# Altium PCB ESP32-S3-M.2_2024-03-15.pcbdoc
Units mm, origin at the board's own origin, x right, y up, seen from the top; angles counter-clockwise.
Board outline 83.3 x 61.58 mm, 2 copper layers (Top Layer, Bottom Layer); 10 components, 41 nets, 120 pads, 32 vias.
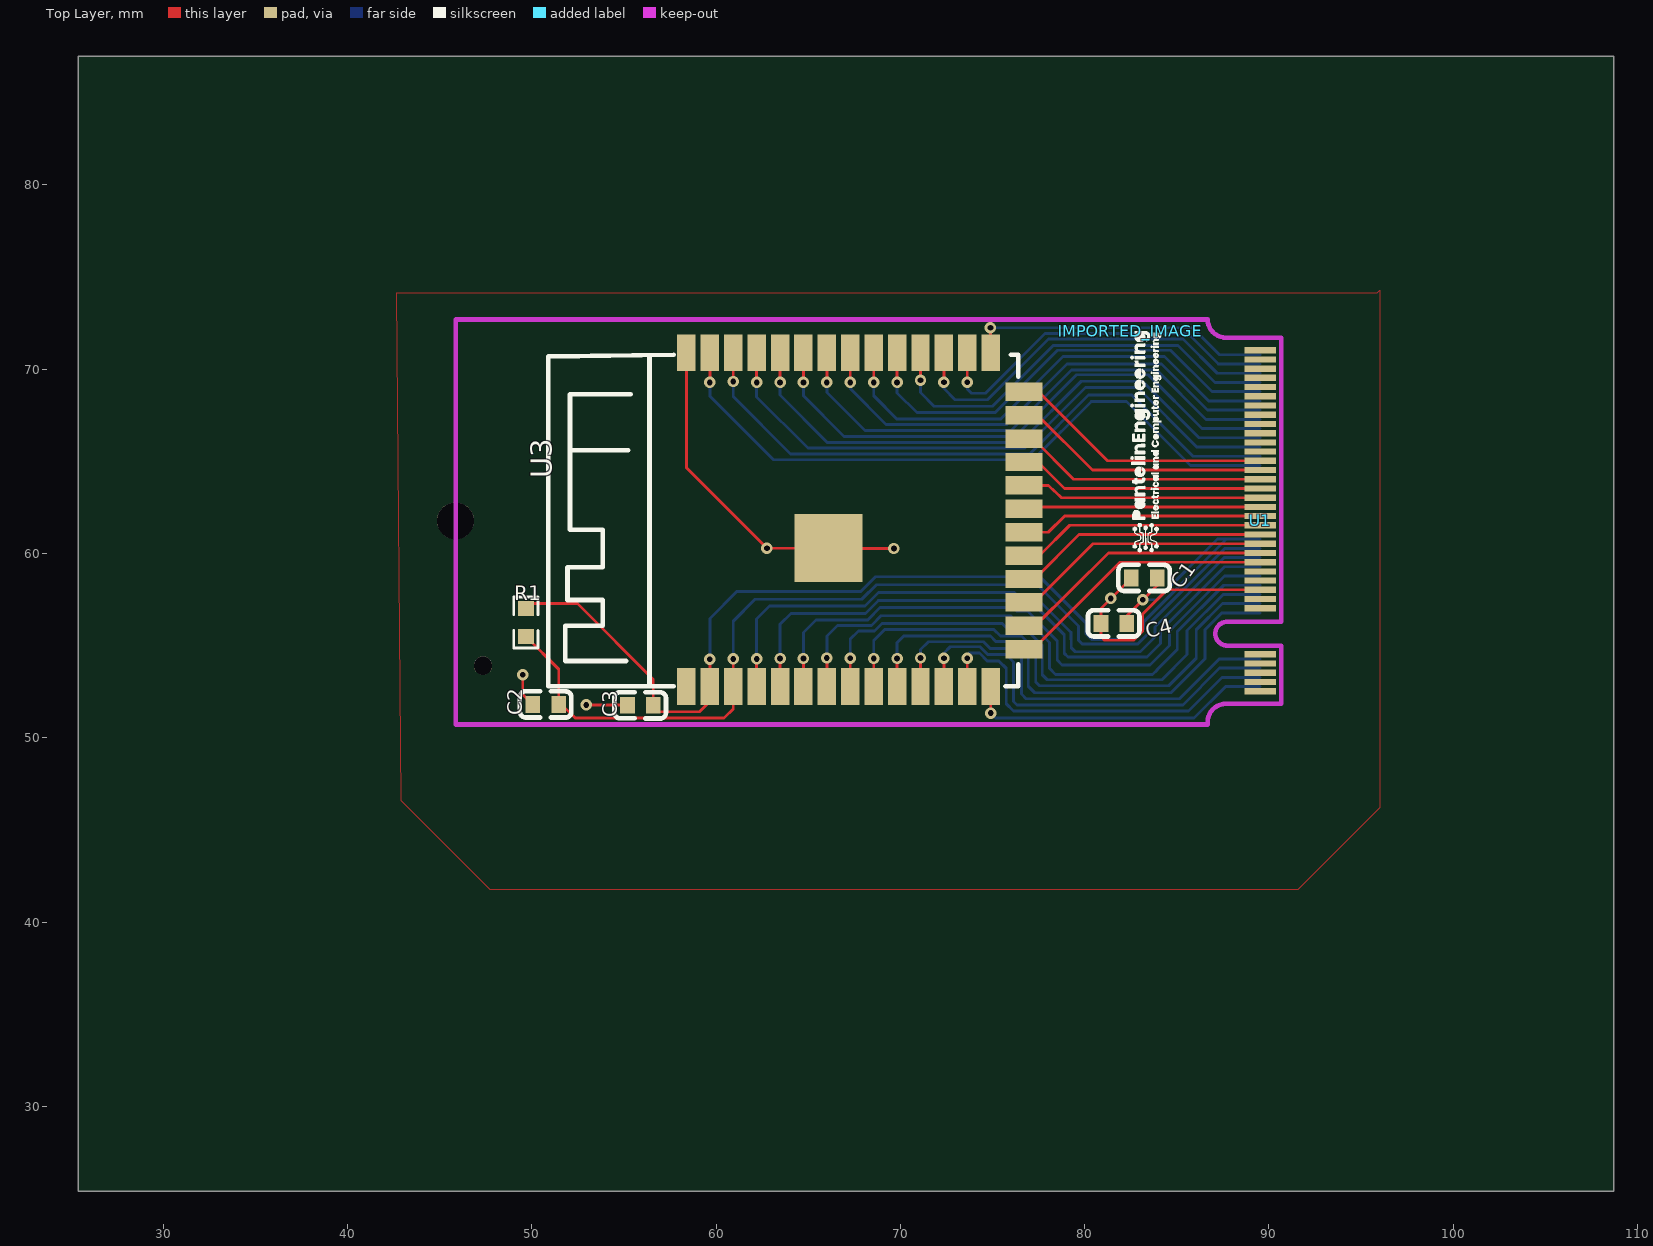
[diagram p0: Top Layer view]
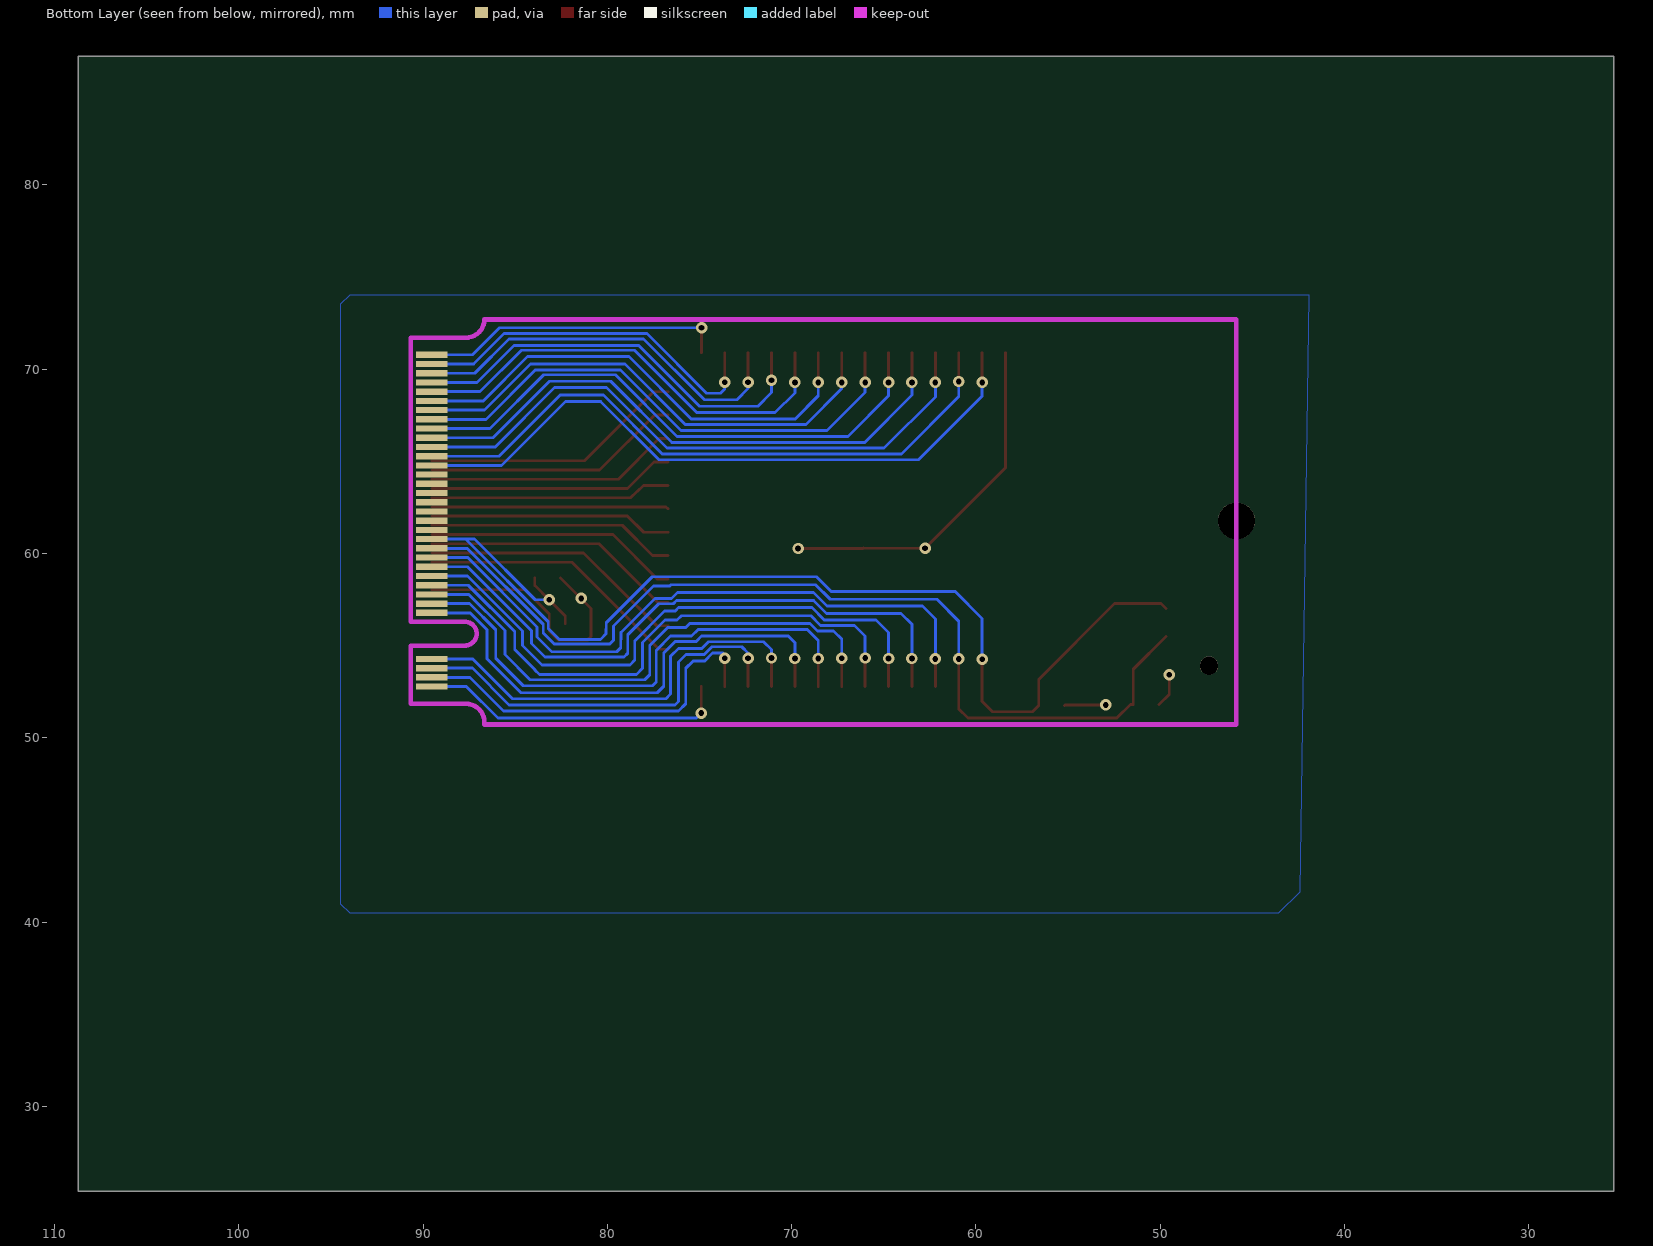
[diagram p1: Bottom Layer view, seen from below]

## Layer stack, top to bottom
Top Layer: signal copper (thickness not stored)
Dielectric: dielectric 0.32, FR-4, Dk 4.8
Bottom Layer: signal copper (thickness not stored)

## Board outline
108.699,25.4 25.4,25.4 25.4,86.975 108.699,86.975

## Components (designator, comment, footprint, x,y, rotation, side; value= is the part's Value field where it differs from the comment)
C1 "22uF" C0603 83.233,58.675 r0 top
C2 "1uF" C0603 50.759,51.811 r0 top
C3 "100nF" C0603 55.891,51.761 r0 top
C4 "2.2uF" C0603 81.583,56.206 r0 top
IMPORTED_IMAGE "IMPORTED_IMAGE" IMPORTED_IMAGE 82.483,72.064 r0 top
R1 "10kΩ" R0603 49.68,56.257 r270 top
U1 "M.2 M key fingers" "M.2 M KEY FINGERS" 90.669,61.782 r0 top
U3 "ESP32-S3-WROOM-1" ESP32-S3-WROOM-1 67.702,61.794 r90 top
? "" ? 68.316,44.994 r0 top
? "" ? 41.998,61.717 r0 top

## Footprints (in the part's own frame and the unit in brackets; to place one, negate y for a bottom-side part, rotate by r counter-clockwise, add the part's x,y. Pads: shape width x height; smd on the part's side, far side on the other; paste and mask are expansions set on the pad)
C0603 [mm]
  rect 0.8x0.9 smd paste+0 mask+0.051: 1(-0.7,0) 2(0.7,0)
  silkscreen extent -1.41,-0.71 1.39,0.72
ESP32-S3-WROOM-1 [mm]
  rect 2x1 smd paste+0 mask+0.051: 1(-9,9.31) 2(-9,8.04) 3(-9,6.77) 4(-9,5.5) 5(-9,4.23) 6(-9,2.96) 7(-9,1.69) 8(-9,0.42) 9(-9,-0.85) 10(-9,-2.12) 11(-9,-3.39) 12(-9,-4.66) 13(-9,-5.93) 14(-9,-7.2) 27(9.1,-7.2) 28(9.1,-5.93) 29(9.1,-4.66) 30(9.1,-3.39) 31(9.1,-2.12) 32(9.1,-0.85) 33(9.1,0.42) 34(9.1,1.69) 35(9.1,2.96) 36(9.1,4.23) 37(9.1,5.5) 38(9.1,6.77) 39(9.1,8.04) 40(9.1,9.31)
  rect 1x2 smd paste+0 mask+0.051: 15(-6.985,-9.005) 16(-5.715,-9.005) 17(-4.445,-9.005) 18(-3.175,-9.005) 19(-1.905,-9.005) 20(-0.635,-9.005) 21(0.635,-9.005) 22(1.905,-9.005) 23(3.175,-9.005) 24(4.445,-9.005) 25(5.715,-9.005) 26(6.985,-9.005)
  rect 3.7x3.7 smd paste+0 mask+0.051: 41(-1.5,1.6)
  silkscreen extent -9,-8.7 9,16.8
IMPORTED_IMAGE [mm]
  silkscreen extent 0,-12 1.68,0
"M.2 M KEY FINGERS" [mm]
  rect 1.7x0.34 smd paste+0 mask+0.051: 1(-1.15,9.25) 3(-1.15,8.75) 5(-1.15,8.249) 7(-1.15,7.749) 9(-1.15,7.249) 11(-1.15,6.749) 13(-1.15,6.249) 15(-1.15,5.749) 17(-1.15,5.249) 19(-1.15,4.749) 21(-1.15,4.249) 23(-1.15,3.749) 25(-1.15,3.249) 27(-1.15,2.749) 29(-1.15,2.249) 31(-1.15,1.749) 33(-1.15,1.249) 35(-1.15,0.749) 37(-1.15,0.249) 39(-1.15,-0.251) 41(-1.15,-0.751) 43(-1.15,-1.251) 45(-1.15,-1.751) 47(-1.15,-2.251) 49(-1.15,-2.751) 51(-1.15,-3.251) 53(-1.15,-3.751) 55(-1.15,-4.251) 57(-1.15,-4.751) 67(-1.15,-7.251) 69(-1.15,-7.751) 71(-1.15,-8.251) 73(-1.15,-8.751) 75(-1.15,-9.251)
  rect 1.7x0.34 smd far side paste+0 mask+0.051: 2(-1.15,9) 4(-1.15,8.501) 6(-1.15,8.001) 8(-1.15,7.501) 10(-1.15,7.001) 12(-1.15,6.501) 14(-1.15,6.001) 16(-1.15,5.501) 18(-1.15,5.001) 20(-1.151,4.499) 22(-1.15,4.001) 24(-1.15,3.501) 26(-1.15,3.001) 28(-1.15,2.501) 30(-1.15,2.001) 32(-1.15,1.501) 34(-1.15,1.001) 36(-1.15,0.501) 38(-1.15,0.001) 40(-1.15,-0.499) 42(-1.151,-0.998) 44(-1.15,-1.499) 46(-1.15,-1.999) 48(-1.15,-2.499) 50(-1.15,-2.999) 52(-1.15,-3.499) 54(-1.15,-3.999) 56(-1.15,-4.499) 58(-1.15,-4.999) 68(-1.15,-7.499) 70(-1.15,-7.999) 72(-1.15,-8.499) 74(-1.15,-8.999)
  Keep-Out Layer lines w0.254: -3,-9.93 0,-9.93 0,-6.78 -2.9,-6.78 ; -3,9.93 0,9.93 0,-5.48 -2.9,-5.48
  Keep-Out Layer lines w0.254: -4,-10.93 cw(c-3,-10.93) -3,-9.93 ; -4,10.93 ccw(c-3,10.93) -3,9.93 ; -2.9,-6.78 cw(c-2.931,-6.13) -2.9,-5.48
R0603 [mm]
  rect 0.806x0.864 smd paste-100 mask+0.051: 1(-0.753,0) 2(0.753,0)
  silkscreen extent -1.39,-0.66 1.39,0.66
? [mm]

## Free pads (board coordinates)
  round 2 hole 2 unplated paste+0: ""(45.858,61.774)
  round 1 hole 1 unplated paste+0: ""(47.354,53.917)

## Via types
v1: diameter 0.62, hole 0.31, Top Layer to Bottom Layer, tented both sides, 32 vias

## Nets (pads, with @x,y where several pads share a name; then routed paths per layer and width w, separated by ;. In a path a pad name is that pad's centre, name@x,y a point inside that pad or via, vN(x,y) a via of type N, cw(c..) or ccw(c..) an arc to the next point about the centre after c; other vN are vias at no path point)
3V3: C1.2 C3.2 C4.2 R1.1 U1.42 U3.2 | length 62.2
  Top Layer w0.154: R1.1 49.954,57.284 52.475,57.284 56.591,53.169 C3.2 ; C3.2 56.929,51.42 59.093,51.42 59.662,51.989 U3.2 ; U3.2 v1(59.661,54.268) ; C4.2 82.282,56.619 v1(83.155,57.492) 83.934,58.27 C1.2
  Bottom Layer w0.154: v1@59.662,54.267 59.662,56.477 61.12,57.935 67.854,57.935 68.659,58.74 77.564,58.74 80.061,56.244 80.074,55.647 80.379,55.342 82.609,55.342 83.208,55.941 83.208,56.297 87.696,60.785 U1.42@89.518,60.785 ; v1(83.155,57.492) 83.909,57.493 87.201,60.785 87.731,60.781
EN: C2.2 R1.2 U1.44 U3.3 | length 52.8
  Top Layer w0.154: R1.2 51.46,53.725 C2.2 51.615,51.812 52.357,51.07 60.43,51.07 60.932,51.573 U3.3 ; U3.3 v1(60.931,54.281)
  Bottom Layer w0.154: v1@60.932,54.28 60.932,56.33 62.121,57.519 67.907,57.519 68.7,58.311 76.538,58.311 76.617,58.232 77.488,58.232 79.657,56.063 79.657,55.296 79.866,55.088 82.883,55.088 83.48,55.685 83.48,56.167 87.597,60.282 U1.44
GND: C1.1 C2.1 C3.1 C4.1 U1.53 U3.1 U3.40 U3.41 | length 37.7
  Top Layer w0.154: v1(49.512,53.423) 49.512,52.36 C2.1@50.06,51.812 ; v1(52.957,51.785) 55.166,51.785 C3.1 ; U3.40 58.391,64.654 v1(62.758,60.287) 66.096,60.287 U3.41 66.121,60.274 v1(69.648,60.274) ; C4.1@80.882,56.206 80.882,55.502 81.087,55.296 82.649,55.296 83.155,55.802 83.155,56.726 84.46,58.032 U1.53 ; C4.1@80.882,56.206 80.882,57.024 v1(81.422,57.564) C1.1
GPIO0: U1.2 U3.27 | length 16.6
  Top Layer w0.154: v1(74.887,72.247) 74.887,70.908 U3.27
  Bottom Layer w0.154: v1(74.887,72.247) 85.845,72.248 87.31,70.783 U1.2
GPIO1: U1.26 U3.39 | length 36.4
  Top Layer w0.154: v1(59.661,69.283) U3.39
  Bottom Layer w0.154: v1(59.661,69.283) 59.662,68.532 63.109,65.085 77.188,65.085 80.361,68.255 82.273,68.255 85.746,64.783 U1.26
GPIO2: U1.24 U3.38 | length 34.9
  Top Layer w0.154: v1(60.931,69.335) U3.38
  Bottom Layer w0.154: v1(60.931,69.335) 60.932,68.522 64.046,65.41 77.018,65.41 80.216,68.608 82.558,68.608 85.88,65.283 U1.24
GPIO3: U1.47 U3.15 | length 14.8
  Top Layer w0.154: U3.15 77.196,54.809 81.918,59.53 U1.47@89.52,59.53
GPIO4: U1.46 U3.4 | length 35.8
  Top Layer w0.154: U3.4 v1(62.201,54.281)
  Bottom Layer w0.154: v1@62.202,54.28 62.202,56.454 62.901,57.155 68.075,57.155 68.817,57.895 76.2,57.895 76.525,57.569 77.409,57.569 79.256,55.725 79.269,54.892 79.49,54.671 83.038,54.684 83.818,55.464 83.818,56.023 87.577,59.782 U1.46@89.52,59.782
GPIO5: U1.48 U3.5 | length 34.2
  Top Layer w0.154: U3.5 v1(63.471,54.307)
  Bottom Layer w0.154: v1(63.471,54.307) 63.472,56.165 64.059,56.752 68.1,56.752 68.804,57.453 76.241,57.453 76.421,57.272 77.214,57.272 78.89,55.593 78.89,54.593 79.098,54.384 83.376,54.384 84.118,55.126 84.118,55.814 87.585,59.284 U1.48
GPIO6: U1.50 U3.6 | length 32.6
  Top Layer w0.154: U3.6 v1(64.741,54.307)
  Bottom Layer w0.154: v1(64.741,54.307) 64.742,55.72 65.423,56.401 68.232,56.401 68.895,57.064 76.134,57.064 76.317,56.881 76.889,56.881 78.514,55.256 78.514,54.217 78.773,53.958 83.546,53.958 84.598,55.009 84.598,55.802 87.58,58.784 U1.50
GPIO7: U1.52 U3.7 | length 31.4
  Top Layer w0.154: U3.7 v1(66.011,54.333)
  Bottom Layer w0.154: v1(66.011,54.333) 66.012,55.532 66.581,56.101 68.425,56.101 68.946,56.622 75.979,56.622 76.213,56.388 76.863,56.388 78.085,55.167 78.085,53.775 78.423,53.437 83.688,53.437 83.922,53.671 83.922,53.696 85.027,54.801 85.027,55.764 87.547,58.283 U1.52
GPIO8/SDA: U1.70 U3.12 | length 22.5
  Top Layer w0.154: U3.12 v1(72.361,54.32)
  Bottom Layer w0.154: v1(72.361,54.32) 72.362,54.603 72.703,54.943 74.316,54.943 74.745,54.516 75.733,54.516 76.134,54.113 76.134,51.981 76.33,51.786 85.327,51.786 87.323,53.782 U1.70
GPIO9/SCL: U1.43 U3.17 | length 14.1
  Top Layer w0.154: U3.17 77.266,57.349 80.449,60.532 U1.43
GPIO10/SS: U1.41 U3.18 | length 13.8
  Top Layer w0.154: U3.18 77.288,58.619 79.701,61.032 U1.41
GPIO11/MOSI: U1.39 U3.19 | length 13.5
  Top Layer w0.154: U3.19 77.544,59.889 79.187,61.532 U1.39
GPIO12/SCK: U1.37 U3.20 | length 13.2
  Top Layer w0.154: U3.20 78.022,61.159 78.916,62.032 U1.37
GPIO13/MISO: U1.35 U3.21 | length 12.9
  Top Layer w0.154: U3.21 76.81,62.532 U1.35
GPIO14: U1.33 U3.22 | length 13.1
  Top Layer w0.154: U3.22 78.042,63.699 78.735,63.03 U1.33@89.52,63.03
GPIO15: U1.54 U3.8 | length 30
  Top Layer w0.154: U3.8 v1(67.281,54.32)
  Bottom Layer w0.154: v1(67.281,54.32) 67.282,55.36 67.722,55.799 68.603,55.799 69.01,56.206 75.525,56.206 75.746,55.985 76.721,55.985 77.696,55.009 77.696,53.424 77.968,53.15 84.196,53.15 85.56,54.516 85.56,55.83 87.516,57.783 U1.54
GPIO16: U1.56 U3.9 | length 28.7
  Top Layer w0.154: U3.9 v1(68.551,54.307)
  Bottom Layer w0.154: v1(68.551,54.307) 68.552,55.278 69.154,55.88 75.07,55.88 75.433,55.517 76.564,55.517 77.343,54.737 77.343,53.033 77.552,52.825 84.559,52.825 86.056,54.321 86.056,55.868 87.47,57.282 U1.56
GPIO17: U1.58 U3.10 | length 27.3
  Top Layer w0.154: U3.10 v1(69.821,54.307)
  Bottom Layer w0.154: v1(69.821,54.307) 69.822,55.156 70.183,55.517 74.887,55.517 75.174,55.23 76.317,55.23 76.942,54.605 76.942,52.799 77.293,52.449 84.676,52.449 86.523,54.295 86.523,55.868 87.437,56.782 U1.58@89.52,56.782
GPIO18: U1.68 U3.11 | length 24
  Top Layer w0.154: U3.11 v1(71.091,54.333)
  Bottom Layer w0.154: v1(71.091,54.333) 71.092,54.788 71.522,55.217 74.511,55.217 74.874,54.854 76.134,54.854 76.564,54.425 76.564,52.383 76.825,52.124 85.144,52.124 87.305,54.283 U1.68
GPIO21: U1.31 U3.23 | length 13.4
  Top Layer w0.154: U3.23 77.46,64.969 78.898,63.531 U1.31
GPIO35: U1.4 U3.28 | length 20
  Top Layer w0.154: v1(73.631,69.296) U3.28
  Bottom Layer w0.154: v1(73.631,69.296) 73.632,68.928 73.861,68.697 74.615,68.697 77.851,71.936 85.598,71.936 87.252,70.282 U1.4
GPIO36: U1.6 U3.29 | length 21.5
  Top Layer w0.154: v1(72.361,69.296) U3.29
  Bottom Layer w0.154: v1(72.361,69.296) 72.362,68.949 72.964,68.347 74.732,68.347 78.032,71.649 85.327,71.649 87.191,69.784 U1.6
GPIO37: U1.8 U3.30 | length 23.2
  Top Layer w0.154: v1@71.091,69.296 U3.30
  Bottom Layer w0.154: v1@71.092,69.406 71.092,68.738 71.832,67.996 75.004,67.996 78.293,71.285 85.067,71.285 87.069,69.284 U1.8
  other v1: 71.091,69.407
GPIO38: U1.10 U3.31 | length 24.6
  Top Layer w0.154: v1(69.821,69.283) U3.31
  Bottom Layer w0.154: v1(69.821,69.283) 69.822,68.72 70.897,67.646 75.146,67.646 78.532,71.029 84.659,71.029 86.906,68.784 U1.10
GPIO39: U1.12 U3.32 | length 26.2
  Top Layer w0.154: v1(68.551,69.283) U3.32
  Bottom Layer w0.154: v1(68.551,69.283) 68.552,68.56 69.805,67.308 75.446,67.308 78.829,70.689 84.326,70.689 86.729,68.283 U1.12
GPIO40: U1.14 U3.33 | length 27.4
  Top Layer w0.154: v1(67.281,69.283) U3.33
  Bottom Layer w0.154: v1(67.281,69.283) 67.282,68.946 69.22,67.008 75.771,67.008 79.048,70.285 84.168,70.285 86.67,67.783 U1.14
GPIO41: U1.16 U3.34 | length 29
  Top Layer w0.154: v1(66.011,69.283) U3.34
  Bottom Layer w0.154: v1(66.011,69.283) 66.012,68.745 68.075,66.683 76.01,66.683 79.284,69.96 83.909,69.96 86.586,67.282 U1.16
GPIO42: U1.18 U3.35 | length 30.6
  Top Layer w0.154: v1(64.741,69.283) U3.35
  Bottom Layer w0.154: v1(64.741,69.283) 64.742,68.56 66.945,66.358 76.213,66.358 79.558,69.703 83.45,69.703 86.371,66.782 U1.18@89.52,66.782
GPIO45: U1.25 U3.26 | length 14.4
  Top Layer w0.154: U3.26 77.498,68.779 81.245,65.031 U1.25
GPIO46: U1.45 U3.16 | length 14.4
  Top Layer w0.154: U3.16 77.32,56.079 81.293,60.031 U1.45
GPIO47: U1.29 U3.24 | length 13.7
  Top Layer w0.154: U3.24 77.191,66.239 79.398,64.031 U1.29
GPIO48: U1.27 U3.25 | length 14
  Top Layer w0.154: U3.25 77.43,67.509 80.419,64.532 U1.27
S$26685: 
S$60352: 
U0RXD: U1.20 U3.36 | length 32
  Top Layer w0.154: v1(63.471,69.283) U3.36
  Bottom Layer w0.154: v1(63.471,69.283) 63.472,68.596 66.035,66.033 76.5,66.033 79.815,69.347 83.142,69.347 86.21,66.282 U1.20@89.518,66.282
U0TXD: U1.22 U3.37 | length 33.6
  Top Layer w0.154: v1(62.201,69.283) U3.37
  Bottom Layer w0.154: v1(62.201,69.283) 62.202,68.502 64.981,65.72 76.759,65.72 80.048,69.01 82.858,69.01 86.083,65.784 U1.22
USBD+: U1.74 U3.14 | length 16.9
  Top Layer w0.154: v1(74.901,51.343) U3.14
  Bottom Layer w0.154: v1(74.901,51.343) 75.174,51.07 85.936,51.07 87.651,52.784 U1.74
USBD-: U1.72 U3.13 | length 20.8
  Top Layer w0.154: U3.13 v1(73.631,54.32)
  Bottom Layer w0.154: v1(73.631,54.32) 73.632,54.506 73.731,54.605 74.29,54.605 74.717,54.179 75.342,54.179 75.746,53.775 75.746,51.849 76.134,51.461 85.626,51.461 87.447,53.282 U1.72@89.52,53.282
pads on no net: U1.1 U1.3 U1.5 U1.7 U1.9 U1.11 U1.13 U1.15 U1.17 U1.19 U1.21 U1.23 U1.28 U1.30 U1.32 U1.34 U1.36 U1.38 U1.40 U1.49 U1.51 U1.55 U1.57 U1.67 U1.69 U1.71 U1.73 U1.75

## Polygon pours and split planes (outlines as drawn)
GND on Bottom Layer (solid): 41.906,74.028 93.971,74.028 94.478,73.521 94.478,41.008 93.971,40.501 43.557,40.501 42.414,41.645
GND on Top Layer (solid): 42.66,74.158 95.882,74.158 95.999,74.275 95.999,46.195 91.566,41.762 47.756,41.762 42.92,46.598

## Silkscreen, mask and mechanical layers (free items; w line width, h text height)
Top Solder:
  circle w1 net S$60352: c45.858,61.763 r1.684